# Altium PCB dc_power_module_v1.PcbDoc (part 2 of 4)
Units mm, origin at the board's own origin, x right, y up, seen from the top; angles counter-clockwise.
Board outline 83.82 x 73.41 mm, 2 copper layers (Top Layer, Bottom Layer); 37 components, 20 nets, 131 pads, 21 vias.
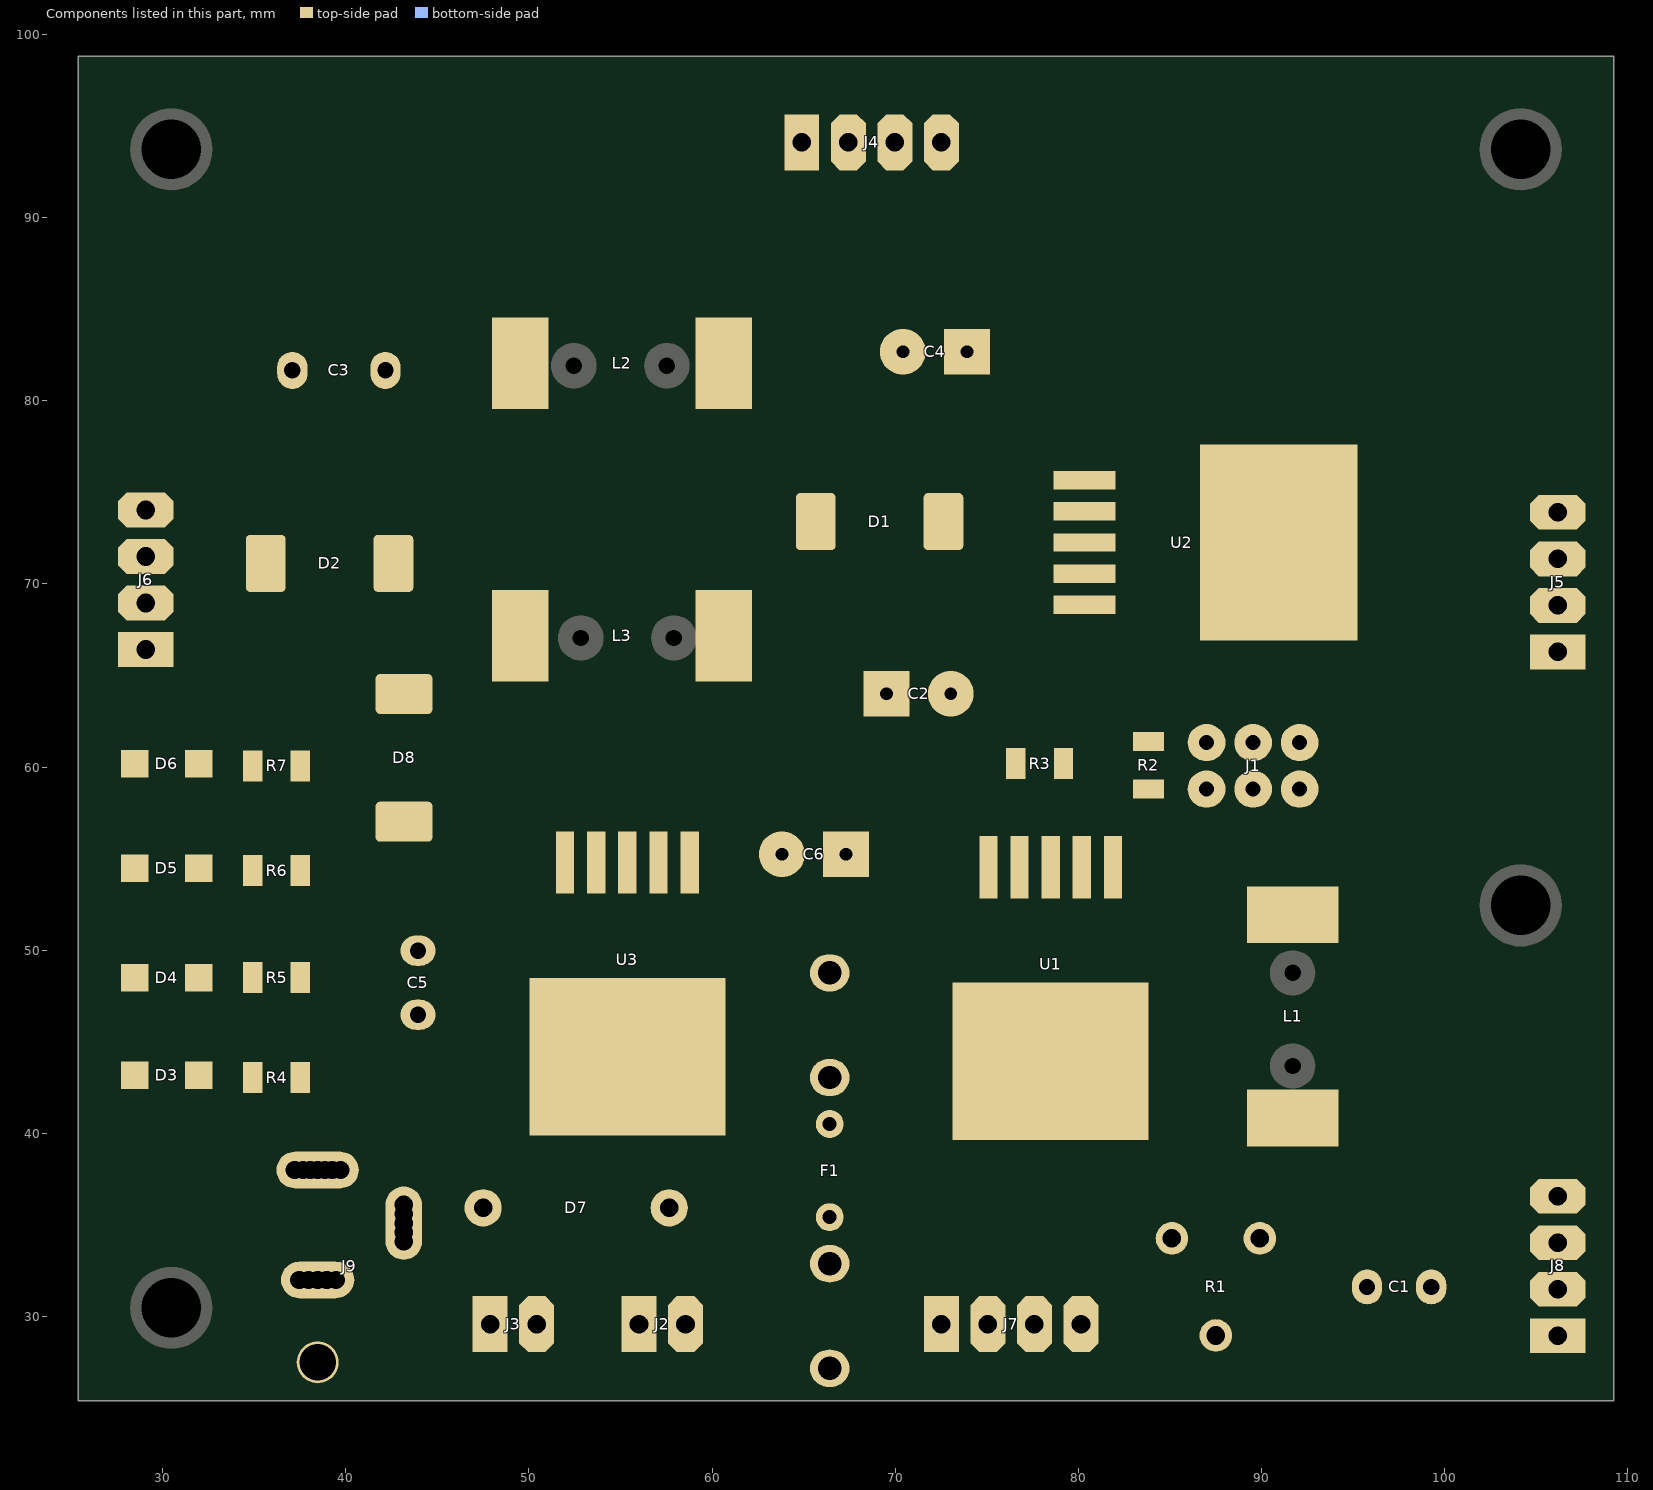
[diagram p2: the components of this part, seen from the top]

## Via types
v1: diameter 1.27, hole 0.711, Top Layer to Bottom Layer, 21 vias

## Nets (pads, with @x,y where several pads share a name; then routed paths per layer and width w, separated by ;. In a path a pad name is that pad's centre, name@x,y a point inside that pad or via, vN(x,y) a via of type N, cw(c..) or ccw(c..) an arc to the next point about the centre after c; other vN are vias at no path point) (continued)
copper on no net: (continued)
  Top Layer w0.008: 38.231,92.881 38.346,92.881 ; 38.231,92.889 38.262,92.889 ; 38.239,92.935 38.254,92.935 ; 38.239,92.942 38.262,92.942 ; 38.239,92.95 38.262,92.95 ; 38.239,92.958 38.27,92.958 ; 38.239,92.965 38.27,92.965 ; 38.239,92.973 38.277,92.973 ; 38.239,92.981 38.277,92.981 ; 38.239,92.988 38.285,92.988 ; 38.239,92.996 38.292,92.996 ; 38.239,93.003 38.292,93.003 ; 38.247,92.874 38.422,92.874 ; 38.247,93.011 38.3,93.011 ; 38.247,93.019 38.3,93.019 ; 38.247,93.026 38.308,93.026 ; 38.247,93.034 38.315,93.034 ; 38.247,93.041 38.315,93.041 ; 38.247,93.049 38.323,93.049 ; 38.247,93.057 38.331,93.057 ; 38.247,93.064 38.331,93.064 ; 38.247,93.072 38.338,93.072 ; 38.247,93.08 38.346,93.08 ; 38.247,93.087 38.353,93.087 ; 38.254,93.095 38.353,93.095 ; 38.254,93.102 38.361,93.102 ; 38.254,93.11 38.369,93.11 ; 38.254,93.118 38.369,93.118 ; 38.254,93.125 38.376,93.125 ; 38.254,93.133 38.384,93.133 ; 38.254,93.141 38.391,93.141 ; 38.262,92.866 38.498,92.866 ; 38.262,93.148 38.399,93.148 ; 38.262,93.156 38.407,93.156 ; 38.262,93.163 38.407,93.163 ; 38.262,93.171 38.414,93.171 ; 38.262,93.179 38.422,93.179 ; 38.262,93.186 38.43,93.186 ; 38.27,92.859 38.582,92.859 ; 38.27,93.194 38.437,93.194 ; 38.27,93.201 38.445,93.201 ; 38.27,93.209 38.452,93.209 ; 38.27,93.217 38.468,93.217 ; 38.27,93.224 38.475,93.224 ; 38.27,93.232 38.483,93.232 ; 38.277,93.24 38.498,93.24 ; 38.277,93.247 38.506,93.247 ; 38.277,93.255 38.521,93.255 ; 38.277,93.262 38.536,93.262 ; 38.277,93.27 38.551,93.27 ; 38.285,92.851 38.666,92.851 ; 38.285,93.278 38.582,93.278 ; 38.285,93.285 39.275,93.285 ; 38.285,93.293 39.275,93.293 ; 38.285,93.301 39.275,93.301 ; 38.292,93.308 39.268,93.308 ; 38.292,93.316 39.268,93.316 ; 38.292,93.323 39.268,93.323 ; 38.292,93.331 39.26,93.331 ; 38.3,92.843 38.757,92.843 ; 38.3,93.339 39.26,93.339 ; 38.3,93.346 39.26,93.346 ; 38.3,93.354 39.253,93.354 ; 38.3,93.362 39.253,93.362 ; 38.308,93.369 39.245,93.369 ; 38.308,93.377 39.245,93.377 ; 38.308,93.384 39.245,93.384 ; 38.308,93.392 39.237,93.392 ; 38.315,93.4 39.237,93.4 ; 38.315,93.407 39.23,93.407 ; 38.315,93.415 39.23,93.415 ; 38.323,92.836 38.849,92.836 ; 38.323,93.422 39.23,93.422 ; 38.323,93.43 39.222,93.43 ; 38.323,93.438 39.222,93.438 ; 38.323,93.445 39.214,93.445 ; 38.331,93.453 39.214,93.453 ; 38.331,93.461 39.214,93.461 ; 38.331,93.468 39.207,93.468 ; 38.338,92.828 38.948,92.828 ; 38.338,93.476 39.207,93.476 ; 38.338,93.483 39.199,93.483 ; 38.338,93.491 39.199,93.491 ; 38.346,93.499 39.199,93.499 ; 38.346,93.506 39.192,93.506 ; 38.346,93.514 39.192,93.514 ; 38.353,92.82 39.405,92.82 ; 38.353,93.522 39.184,93.522 ; 38.353,93.529 39.184,93.529 ; 38.353,93.537 39.176,93.537 ; 38.361,93.544 39.176,93.544 ; 38.361,93.552 39.169,93.552 ; 38.369,92.813 39.405,92.813 ; 38.369,93.56 39.169,93.56 ; 38.369,93.567 39.161,93.567 ; 38.369,93.575 39.161,93.575 ; 38.376,93.582 39.153,93.582 ; 38.376,93.59 39.153,93.59 ; 38.384,93.598 39.146,93.598 ; 38.384,93.605 39.146,93.605 ; 38.384,93.613 39.138,93.613 ; 38.391,92.805 39.443,92.805 ; 38.391,93.621 39.138,93.621 ; 38.391,93.628 39.131,93.628 ; 38.399,93.636 39.131,93.636 ; 38.399,93.643 39.123,93.643 ; 38.407,92.798 41.798,92.798 ; 38.407,93.651 39.115,93.651 ; 38.407,93.659 39.115,93.659 ; 38.407,93.666 39.108,93.666 ; 38.414,93.674 39.108,93.674 ; 38.414,93.682 39.1,93.682 ; 38.422,93.689 39.1,93.689 ; 38.422,93.697 39.093,93.697 ; 38.43,92.79 41.76,92.79 ; 38.43,93.704 39.085,93.704 ; 38.43,93.712 39.085,93.712 ; 38.437,93.72 39.077,93.72 ; 38.445,92.782 41.721,92.782 ; 38.445,93.727 39.07,93.727 ; 38.445,93.735 39.07,93.735 ; 38.452,93.743 39.062,93.743 ; 38.452,93.75 39.054,93.75 ; 38.46,93.758 39.047,93.758 ; 38.46,93.765 39.047,93.765 ; 38.468,92.775 41.691,92.775 ; 38.468,93.773 39.039,93.773 ; 38.475,93.781 39.032,93.781 ; 38.475,93.788 39.024,93.788 ; 38.483,93.796 39.024,93.796 ; 38.491,92.767 41.653,92.767 ; 38.491,93.803 39.016,93.803 ; 38.491,93.811 39.009,93.811 ; 38.498,93.819 39.001,93.819 ; 38.506,92.76 41.615,92.76 ; 38.506,93.826 38.993,93.826 ; 38.513,93.834 38.986,93.834 ; 38.513,93.842 38.978,93.842 ; 38.521,93.849 38.971,93.849 ; 38.529,92.752 41.577,92.752 ; 38.529,93.857 38.963,93.857 ; 38.536,93.864 38.955,93.864 ; 38.544,93.872 38.948,93.872 ; 38.551,92.744 41.539,92.744 ; 38.551,93.88 38.94,93.88 ; 38.559,93.887 38.932,93.887 ; 38.567,93.895 38.917,93.895 ; 38.574,92.737 41.493,92.737 ; 38.574,93.903 38.91,93.903 ; 38.582,93.91 38.902,93.91 ; 38.597,93.918 38.887,93.918 ; 38.605,92.729 41.455,92.729 ; 38.605,93.925 38.879,93.925 ; 38.62,93.933 38.864,93.933 ; 38.635,92.721 41.401,92.721 ; 38.635,93.278 39.283,93.278 ; 38.635,93.941 38.849,93.941 ; 38.651,93.948 38.826,93.948 ; 38.666,92.714 41.348,92.714 ; 38.666,93.27 39.283,93.27 ; 38.666,93.956 38.811,93.956 ; 38.681,93.262 39.283,93.262 ; 38.696,93.255 39.291,93.255 ; 38.696,93.963 38.772,93.963 ; 38.704,92.706 41.295,92.706 ; 38.712,93.247 39.291,93.247 ; 38.727,93.24 39.291,93.24 ; 38.734,93.232 39.298,93.232 ; 38.742,92.699 41.234,92.699 ; 38.742,93.224 39.298,93.224 ; 38.75,93.217 39.298,93.217 ; 38.765,93.209 39.306,93.209 ; 38.772,93.201 39.306,93.201 ; 38.78,93.194 39.306,93.194 ; 38.788,92.691 41.165,92.691 ; 38.788,93.179 39.313,93.179 ; 38.788,93.186 39.313,93.186 ; 38.795,93.171 39.313,93.171 ; 38.803,93.163 39.313,93.163 ; 38.811,93.156 39.321,93.156 ; 38.818,93.148 39.321,93.148 ; 38.826,93.141 39.321,93.141 ; 38.833,92.683 41.097,92.683 ; 38.833,93.125 39.329,93.125 ; 38.833,93.133 39.329,93.133 ; 38.841,93.118 39.329,93.118 ; 38.849,93.11 39.336,93.11 ; 38.856,93.095 39.336,93.095 ; 38.856,93.102 39.336,93.102 ; 38.864,93.087 39.336,93.087 ; 38.872,93.072 39.344,93.072 ; 38.872,93.08 39.344,93.08 ; 38.879,93.064 39.344,93.064 ; 38.887,93.057 39.344,93.057 ; 38.894,92.676 41.028,92.676 ; 38.894,93.041 39.352,93.041 ; 38.894,93.049 39.352,93.049 ; 38.902,93.026 39.359,93.026 ; 38.902,93.034 39.352,93.034 ; 38.91,93.019 39.359,93.019 ; 38.917,93.003 39.359,93.003 ; 38.917,93.011 39.359,93.011 ; 38.925,92.996 39.367,92.996 ; 38.932,92.981 39.367,92.981 ; 38.932,92.988 39.367,92.988 ; 38.94,92.965 39.374,92.965 ; 38.94,92.973 39.367,92.973 ; 38.948,92.958 39.374,92.958 ; 38.955,92.668 40.944,92.668 ; 38.955,92.942 39.374,92.942 ; 38.955,92.95 39.374,92.95 ; 38.963,92.927 39.382,92.927 ; 38.963,92.935 39.382,92.935 ; 38.971,92.912 39.382,92.912 ; 38.971,92.92 39.382,92.92 ; 38.978,92.904 39.39,92.904 ; 38.986,92.889 39.39,92.889 ; 38.986,92.897 39.39,92.897 ; 38.993,92.874 39.397,92.874 ; 38.993,92.881 39.39,92.881 ; 39.001,92.859 39.397,92.859 ; 39.001,92.866 39.397,92.866 ; 39.009,92.843 39.405,92.843 ; 39.009,92.851 39.397,92.851 ; 39.016,92.828 39.405,92.828 ; 39.016,92.836 39.405,92.836 ; 39.024,92.66 40.86,92.66 ; 39.1,92.645 40.662,92.645 ; 39.1,92.653 40.769,92.653 ; 39.108,92.622 39.451,92.622 ; 39.108,92.63 39.443,92.63 ; 39.108,92.638 40.548,92.638 ; 39.115,92.6 39.451,92.6 ; 39.115,92.607 39.451,92.607 ; 39.115,92.615 39.451,92.615 ; 39.123,92.584 39.458,92.584 ; 39.123,92.592 39.451,92.592 ; 39.131,92.561 39.458,92.561 ; 39.131,92.569 39.458,92.569 ; 39.131,92.577 39.458,92.577 ; 39.138,92.539 39.466,92.539 ; 39.138,92.546 39.466,92.546 ; 39.138,92.554 39.458,92.554 ; 39.146,92.516 39.466,92.516 ; 39.146,92.523 39.466,92.523 ; 39.146,92.531 39.466,92.531 ; 39.153,92.493 39.474,92.493 ; 39.153,92.5 39.474,92.5 ; 39.153,92.508 39.466,92.508 ; 39.161,92.47 39.474,92.47 ; 39.161,92.478 39.474,92.478 ; 39.161,92.485 39.474,92.485 ; 39.169,92.447 39.481,92.447 ; 39.169,92.455 39.481,92.455 ; 39.169,92.462 39.474,92.462 ; 39.176,92.424 39.481,92.424 ; 39.176,92.432 39.481,92.432 ; 39.176,92.439 39.481,92.439 ; 39.184,92.401 39.489,92.401 ; 39.184,92.409 39.489,92.409 ; 39.184,92.417 39.481,92.417 ; 39.192,92.379 39.489,92.379 ; 39.192,92.386 39.489,92.386 ; 39.192,92.394 39.489,92.394 ; 39.199,92.348 39.496,92.348 ; 39.199,92.356 39.496,92.356 ; 39.199,92.363 39.496,92.363 ; 39.199,92.371 39.489,92.371 ; 39.207,92.325 39.496,92.325 ; 39.207,92.333 39.496,92.333 ; 39.207,92.34 39.496,92.34 ; 39.214,92.295 39.504,92.295 ; 39.214,92.302 39.504,92.302 ; 39.214,92.31 39.504,92.31 ; 39.214,92.318 39.504,92.318 ; 39.222,92.272 39.512,92.272 ; 39.222,92.279 39.504,92.279 ; 39.222,92.287 39.504,92.287 ; 39.23,92.241 39.512,92.241 ; 39.23,92.249 39.512,92.249 ; 39.23,92.257 39.512,92.257 ; 39.23,92.264 39.512,92.264 ; 39.237,92.211 39.519,92.211 ; 39.237,92.219 39.519,92.219 ; 39.237,92.226 39.512,92.226 ; 39.237,92.234 39.512,92.234 ; 39.245,92.18 39.519,92.18 ; 39.245,92.188 39.519,92.188 ; 39.245,92.196 39.519,92.196 ; 39.245,92.203 39.519,92.203 ; 39.253,92.15 39.527,92.15 ; 39.253,92.158 39.527,92.158 ; 39.253,92.165 39.527,92.165 ; 39.253,92.173 39.519,92.173 ; 39.26,92.119 39.527,92.119 ; 39.26,92.127 39.527,92.127 ; 39.26,92.135 39.527,92.135 ; 39.26,92.142 39.527,92.142 ; 39.268,92.089 39.534,92.089 ; 39.268,92.097 39.534,92.097 ; 39.268,92.104 39.534,92.104 ; 39.268,92.112 39.534,92.112 ; 39.275,92.058 39.534,92.058 ; 39.275,92.066 39.534,92.066 ; 39.275,92.074 39.534,92.074 ; 39.275,92.081 39.534,92.081 ; 39.283,92.02 39.542,92.02 ; 39.283,92.028 39.542,92.028 ; 39.283,92.036 39.542,92.036 ; 39.283,92.043 39.542,92.043 ; 39.283,92.051 39.542,92.051 ; 39.291,91.99 39.55,91.99 ; 39.291,91.998 39.542,91.998 ; 39.291,92.005 39.542,92.005 ; 39.291,92.013 39.542,92.013 ; 39.298,91.952 39.55,91.952 ; 39.298,91.959 39.55,91.959 ; 39.298,91.967 39.55,91.967 ; 39.298,91.975 39.55,91.975 ; 39.298,91.982 39.55,91.982 ; 39.306,91.921 39.557,91.921 ; 39.306,91.929 39.557,91.929 ; 39.306,91.937 39.55,91.937 ; 39.306,91.944 39.55,91.944 ; 39.313,91.883 39.557,91.883 ; 39.313,91.891 39.557,91.891 ; 39.313,91.898 39.557,91.898 ; 39.313,91.906 39.557,91.906 ; 39.313,91.914 39.557,91.914 ; 39.321,91.845 39.565,91.845 ; 39.321,91.853 39.565,91.853 ; 39.321,91.86 39.565,91.86 ; 39.321,91.868 39.565,91.868 ; 39.321,91.876 39.557,91.876 ; 39.329,91.799 39.565,91.799 ; 39.329,91.807 39.565,91.807 ; 39.329,91.815 39.565,91.815 ; 39.329,91.822 39.565,91.822 ; 39.329,91.83 39.565,91.83 ; 39.329,91.838 39.565,91.838 ; 39.336,91.761 39.573,91.761 ; 39.336,91.769 39.573,91.769 ; 39.336,91.777 39.573,91.777 ; 39.336,91.784 39.573,91.784 ; 39.336,91.792 39.573,91.792 ; 39.344,91.723 39.58,91.723 ; 39.344,91.731 39.573,91.731 ; 39.344,91.738 39.573,91.738 ; 39.344,91.746 39.573,91.746 ; 39.344,91.754 39.573,91.754 ; 39.352,91.677 39.58,91.677 ; 39.352,91.685 39.58,91.685 ; 39.352,91.693 39.58,91.693 ; 39.352,91.7 39.58,91.7 ; 39.352,91.708 39.58,91.708 ; 39.352,91.716 39.58,91.716 ; 39.359,91.632 39.588,91.632 ; 39.359,91.639 39.588,91.639 ; 39.359,91.647 39.588,91.647 ; 39.359,91.655 39.58,91.655 ; 39.359,91.662 39.58,91.662 ; 39.359,91.67 39.58,91.67 ; 39.367,91.586 39.588,91.586 ; 39.367,91.594 39.588,91.594 ; 39.367,91.601 39.588,91.601 ; 39.367,91.609 39.588,91.609 ; 39.367,91.617 39.588,91.617 ; 39.367,91.624 39.588,91.624 ; 39.374,88.965 39.382,88.965 ; 39.374,88.972 39.382,88.972 ; 39.374,88.98 39.39,88.98 ; 39.374,88.988 39.39,88.988 ; 39.374,88.995 39.397,88.995 ; 39.374,89.003 39.397,89.003 ; 39.374,89.01 39.405,89.01 ; 39.374,89.018 39.405,89.018 ; 39.374,89.026 39.413,89.026 ; 39.374,89.033 39.413,89.033 ; 39.374,89.041 39.42,89.041 ; 39.374,89.049 39.42,89.049 ; 39.374,89.056 39.42,89.056 ; 39.374,89.064 39.428,89.064 ; 39.374,89.071 39.428,89.071 ; 39.374,89.079 39.435,89.079 ; 39.374,91.54 39.595,91.54 ; 39.374,91.548 39.595,91.548 ; 39.374,91.556 39.595,91.556 ; 39.374,91.563 39.595,91.563 ; 39.374,91.571 39.588,91.571 ; 39.374,91.578 39.588,91.578 ; 39.382,89.087 39.435,89.087 ; 39.382,89.094 39.435,89.094 ; 39.382,89.102 39.443,89.102 ; 39.382,89.11 39.443,89.11 ; 39.382,89.117 39.443,89.117 ; 39.382,89.125 39.451,89.125 ; 39.382,89.132 39.451,89.132 ; 39.382,91.487 39.595,91.487 ; 39.382,91.495 39.595,91.495 ; 39.382,91.502 39.595,91.502 ; 39.382,91.51 39.595,91.51 ; 39.382,91.517 39.595,91.517 ; 39.382,91.525 39.595,91.525 ; 39.382,91.533 39.595,91.533 ; 39.39,89.14 39.451,89.14 ; 39.39,89.148 39.458,89.148 ; 39.39,89.155 39.458,89.155 ; 39.39,89.163 39.458,89.163 ; 39.39,89.171 39.466,89.171 ; 39.39,89.178 39.466,89.178 ; 39.39,91.434 39.603,91.434 ; 39.39,91.441 39.603,91.441 ; 39.39,91.449 39.603,91.449 ; 39.39,91.457 39.603,91.457 ; 39.39,91.464 39.603,91.464 ; 39.39,91.472 39.603,91.472 ; 39.39,91.479 39.595,91.479 ; 39.397,89.186 39.466,89.186 ; 39.397,89.193 39.474,89.193 ; 39.397,89.201 39.474,89.201 ; 39.397,89.209 39.474,89.209 ; 39.397,89.216 39.474,89.216 ; 39.397,89.224 39.481,89.224 ; 39.397,91.38 39.603,91.38 ; 39.397,91.388 39.603,91.388 ; 39.397,91.396 39.603,91.396 ; 39.397,91.403 39.603,91.403 ; 39.397,91.411 39.603,91.411 ; 39.397,91.418 39.603,91.418 ; 39.397,91.426 39.603,91.426 ; 39.405,89.231 39.481,89.231 ; 39.405,89.239 39.481,89.239 ; 39.405,89.247 39.481,89.247 ; 39.405,89.254 39.489,89.254 ; 39.405,89.262 39.489,89.262 ; 39.405,89.27 39.489,89.27 ; 39.405,91.327 39.611,91.327 ; 39.405,91.335 39.611,91.335 ; 39.405,91.342 39.611,91.342 ; 39.405,91.35 39.611,91.35 ; 39.405,91.357 39.611,91.357 ; 39.405,91.365 39.611,91.365 ; 39.405,91.373 39.611,91.373 ; 39.413,89.277 39.489,89.277 ; 39.413,89.285 39.496,89.285 ; 39.413,89.292 39.496,89.292 ; 39.413,89.3 39.496,89.3 ; 39.413,89.308 39.496,89.308 ; 39.413,89.315 39.504,89.315 ; 39.413,91.266 39.611,91.266 ; 39.413,91.274 39.611,91.274 ; 39.413,91.281 39.611,91.281 ; 39.413,91.289 39.611,91.289 ; 39.413,91.296 39.611,91.296 ; 39.413,91.304 39.611,91.304 ; 39.413,91.312 39.611,91.312 ; 39.413,91.319 39.611,91.319 ; 39.42,89.323 39.504,89.323 ; 39.42,89.331 39.504,89.331 ; 39.42,89.338 39.504,89.338 ; 39.42,89.346 39.512,89.346 ; 39.42,89.353 39.512,89.353 ; 39.42,89.361 39.512,89.361 ; 39.42,91.205 39.618,91.205 ; 39.42,91.213 39.618,91.213 ; 39.42,91.22 39.618,91.22 ; 39.42,91.228 39.618,91.228 ; 39.42,91.236 39.618,91.236 ; 39.42,91.243 39.618,91.243 ; 39.42,91.251 39.618,91.251 ; 39.42,91.258 39.618,91.258 ; 39.428,89.369 39.512,89.369 ; 39.428,89.376 39.512,89.376 ; 39.428,89.384 39.519,89.384 ; 39.428,89.391 39.519,89.391 ; 39.428,89.399 39.519,89.399 ; 39.428,89.407 39.519,89.407 ; 39.428,91.136 39.618,91.136 ; 39.428,91.144 39.618,91.144 ; 39.428,91.152 39.618,91.152 ; 39.428,91.159 39.618,91.159 ; 39.428,91.167 39.618,91.167 ; 39.428,91.175 39.618,91.175 ; 39.428,91.182 39.618,91.182 ; 39.428,91.19 39.618,91.19 ; 39.428,91.197 39.618,91.197 ; 39.435,89.414 39.519,89.414 ; 39.435,89.422 39.527,89.422 ; 39.435,89.43 39.527,89.43 ; 39.435,89.437 39.527,89.437 ; 39.435,89.445 39.527,89.445 ; 39.435,89.452 39.527,89.452 ; 39.435,91.068 39.626,91.068 ; 39.435,91.076 39.626,91.076 ; 39.435,91.083 39.626,91.083 ; 39.435,91.091 39.626,91.091 ; 39.435,91.098 39.626,91.098 ; 39.435,91.106 39.626,91.106 ; 39.435,91.114 39.626,91.114 ; 39.435,91.121 39.626,91.121 ; 39.435,91.129 39.626,91.129 ; 39.443,89.46 39.534,89.46 ; 39.443,89.468 39.534,89.468 ; 39.443,89.475 39.534,89.475 ; 39.443,89.483 39.534,89.483 ; 39.443,89.491 39.534,89.491 ; 39.443,89.498 39.534,89.498 ; 39.443,89.506 39.542,89.506 ; 39.443,90.992 39.626,90.992 ; 39.443,90.999 39.626,90.999 ; 39.443,91.007 39.626,91.007 ; 39.443,91.015 39.626,91.015 ; 39.443,91.022 39.626,91.022 ; 39.443,91.03 39.626,91.03 ; 39.443,91.037 39.626,91.037 ; 39.443,91.045 39.626,91.045 ; 39.443,91.053 39.626,91.053 ; 39.443,91.06 39.626,91.06 ; 39.451,89.513 39.542,89.513 ; 39.451,89.521 39.542,89.521 ; 39.451,89.529 39.542,89.529 ; 39.451,89.536 39.542,89.536 ; 39.451,89.544 39.542,89.544 ; 39.451,89.552 39.55,89.552 ; 39.451,89.559 39.55,89.559 ; 39.451,89.567 39.55,89.567 ; 39.451,90.908 39.634,90.908 ; 39.451,90.915 39.634,90.915 ; 39.451,90.923 39.634,90.923 ; 39.451,90.931 39.634,90.931 ; 39.451,90.938 39.634,90.938 ; 39.451,90.946 39.634,90.946 ; 39.451,90.954 39.634,90.954 ; 39.451,90.961 39.626,90.961 ; 39.451,90.969 39.626,90.969 ; 39.451,90.976 39.626,90.976 ; 39.451,90.984 39.626,90.984 ; 39.458,89.574 39.55,89.574 ; 39.458,89.582 39.55,89.582 ; 39.458,89.59 39.55,89.59 ; 39.458,89.597 39.557,89.597 ; 39.458,89.605 39.557,89.605 ; 39.458,89.612 39.557,89.612 ; 39.458,89.62 39.557,89.62 ; 39.458,89.628 39.557,89.628 ; 39.458,89.635 39.557,89.635 ; 39.458,89.643 39.557,89.643 ; 39.458,89.651 39.565,89.651 ; 39.458,90.816 39.634,90.816 ; 39.458,90.824 39.634,90.824 ; 39.458,90.832 39.634,90.832 ; 39.458,90.839 39.634,90.839 ; 39.458,90.847 39.634,90.847 ; 39.458,90.855 39.634,90.855 ; 39.458,90.862 39.634,90.862 ; 39.458,90.87 39.634,90.87 ; 39.458,90.877 39.634,90.877 ; 39.458,90.885 39.634,90.885 ; 39.458,90.893 39.634,90.893 ; 39.458,90.9 39.634,90.9 ; 39.466,89.658 39.565,89.658 ; 39.466,89.666 39.565,89.666 ; 39.466,89.673 39.565,89.673 ; 39.466,89.681 39.565,89.681 ; 39.466,89.689 39.565,89.689 ; 39.466,89.696 39.565,89.696 ; 39.466,89.704 39.573,89.704 ; 39.466,89.712 39.573,89.712 ; 39.466,89.719 39.573,89.719 ; 39.466,89.727 39.573,89.727 ; 39.466,89.734 39.573,89.734 ; 39.466,89.742 39.573,89.742 ; 39.466,89.75 39.573,89.75 ; 39.466,89.757 39.573,89.757 ; 39.466,89.765 39.58,89.765 ; 39.466,89.772 39.58,89.772 ; 39.466,90.71 39.634,90.71 ; 39.466,90.717 39.634,90.717 ; 39.466,90.725 39.634,90.725 ; 39.466,90.733 39.634,90.733 ; 39.466,90.74 39.634,90.74 ; 39.466,90.748 39.634,90.748 ; 39.466,90.755 39.634,90.755 ; 39.466,90.763 39.634,90.763 ; 39.466,90.771 39.634,90.771 ; 39.466,90.778 39.634,90.778 ; 39.466,90.786 39.634,90.786 ; 39.466,90.794 39.634,90.794 ; 39.466,90.801 39.634,90.801 ; 39.466,90.809 39.634,90.809 ; 39.474,89.78 39.58,89.78 ; 39.474,89.788 39.58,89.788 ; 39.474,89.795 39.58,89.795 ; 39.474,89.803 39.58,89.803 ; 39.474,89.811 39.58,89.811 ; 39.474,89.818 39.58,89.818 ; 39.474,89.826 39.588,89.826 ; 39.474,89.833 39.588,89.833 ; 39.474,89.841 39.588,89.841 ; 39.474,89.849 39.588,89.849 ; 39.474,89.856 39.588,89.856 ; 39.474,89.864 39.588,89.864 ; 39.474,89.872 39.588,89.872 ; 39.474,89.879 39.588,89.879 ; 39.474,89.887 39.588,89.887 ; 39.474,89.894 39.595,89.894 ; 39.474,89.902 39.595,89.902 ; 39.474,89.91 39.595,89.91 ; 39.474,89.917 39.595,89.917 ; 39.474,89.925 39.595,89.925 ; 39.474,90.573 39.634,90.573 ; 39.474,90.58 39.634,90.58 ; 39.474,90.588 39.634,90.588 ; 39.474,90.595 39.634,90.595 ; 39.474,90.603 39.634,90.603 ; 39.474,90.611 39.634,90.611 ; 39.474,90.618 39.634,90.618 ; 39.474,90.626 39.634,90.626 ; 39.474,90.634 39.634,90.634 ; 39.474,90.641 39.634,90.641 ; 39.474,90.649 39.634,90.649 ; 39.474,90.656 39.634,90.656 ; 39.474,90.664 39.634,90.664 ; 39.474,90.672 39.634,90.672 ; 39.474,90.679 39.634,90.679 ; 39.474,90.687 39.634,90.687 ; 39.474,90.695 39.634,90.695 ; 39.474,90.702 39.634,90.702 ; 39.481,89.933 39.595,89.933 ; 39.481,89.94 39.595,89.94 ; 39.481,89.948 39.595,89.948 ; 39.481,89.955 39.595,89.955 ; 39.481,89.963 39.595,89.963 ; 39.481,89.971 39.603,89.971 ; 39.481,89.978 39.603,89.978 ; 39.481,89.986 39.603,89.986 ; 39.481,89.993 39.603,89.993 ; 39.481,90.001 39.603,90.001 ; 39.481,90.009 39.603,90.009 ; 39.481,90.016 39.603,90.016 ; 39.481,90.024 39.603,90.024 ; 39.481,90.032 39.603,90.032 ; 39.481,90.039 39.603,90.039 ; 39.481,90.047 39.603,90.047 ; 39.481,90.054 39.603,90.054 ; 39.481,90.062 39.611,90.062 ; 39.481,90.07 39.611,90.07 ; 39.481,90.077 39.611,90.077 ; 39.481,90.085 39.611,90.085 ; 39.481,90.093 39.611,90.093 ; 39.481,90.1 39.611,90.1 ; 39.481,90.108 39.611,90.108 ; 39.481,90.115 39.611,90.115 ; 39.481,90.123 39.611,90.123 ; 39.481,90.131 39.611,90.131 ; 39.481,90.138 39.611,90.138 ; 39.481,90.146 39.611,90.146 ; 39.481,90.153 39.618,90.153 ; 39.481,90.161 39.618,90.161 ; 39.481,90.169 39.618,90.169 ; 39.481,90.176 39.618,90.176 ; 39.481,90.184 39.618,90.184 ; 39.481,90.192 39.618,90.192 ; 39.481,90.199 39.618,90.199 ; 39.481,90.207 39.618,90.207 ; 39.481,90.214 39.618,90.214 ; 39.481,90.222 39.618,90.222 ; 39.481,90.23 39.618,90.23 ; 39.481,90.237 39.618,90.237 ; 39.481,90.245 39.618,90.245 ; 39.481,90.253 39.618,90.253 ; 39.481,90.26 39.618,90.26 ; 39.481,90.268 39.626,90.268 ; 39.481,90.275 39.626,90.275 ; 39.481,90.283 39.626,90.283 ; 39.481,90.291 39.626,90.291 ; 39.481,90.298 39.626,90.298 ; 39.481,90.306 39.626,90.306 ; 39.481,90.314 39.626,90.314 ; 39.481,90.321 39.626,90.321 ; 39.481,90.329 39.626,90.329 ; 39.481,90.336 39.626,90.336 ; 39.481,90.344 39.626,90.344 ; 39.481,90.352 39.626,90.352 ; 39.481,90.359 39.626,90.359 ; 39.481,90.367 39.626,90.367 ; 39.481,90.374 39.626,90.374 ; 39.481,90.382 39.626,90.382 ; 39.481,90.39 39.626,90.39 ; 39.481,90.397 39.626,90.397 ; 39.481,90.405 39.626,90.405 ; 39.481,90.413 39.626,90.413 ; 39.481,90.42 39.634,90.42 ; 39.481,90.428 39.634,90.428 ; 39.481,90.435 39.634,90.435 ; 39.481,90.443 39.634,90.443 ; 39.481,90.451 39.634,90.451 ; 39.481,90.458 39.634,90.458 ; 39.481,90.466 39.634,90.466 ; 39.481,90.474 39.634,90.474 ; 39.481,90.481 39.634,90.481 ; 39.481,90.489 39.634,90.489 ; 39.481,90.496 39.634,90.496 ; 39.481,90.504 39.634,90.504 ; 39.481,90.512 39.634,90.512 ; 39.481,90.519 39.634,90.519 ; 39.481,90.527 39.634,90.527 ; 39.481,90.534 39.634,90.534 ; 39.481,90.542 39.634,90.542 ; 39.481,90.55 39.634,90.55 ; 39.481,90.557 39.634,90.557 ; 39.481,90.565 39.634,90.565 ; 39.496,92.63 40.411,92.63 ; 39.573,92.394 39.618,92.394 ; 39.58,92.386 39.702,92.386 ; 39.595,92.379 39.786,92.379 ; 39.611,92.371 39.87,92.371 ; 39.626,92.363 39.969,92.363 ; 39.641,92.356 40.068,92.356 ; 39.664,92.348 40.197,92.348 ; 39.672,92.805 41.828,92.805 ; 39.687,92.34 40.388,92.34 ; 39.71,92.333 43.261,92.333 ; 39.733,92.325 43.223,92.325 ; 39.763,92.318 43.177,92.318 ; 39.778,92.622 40.22,92.622 ; 39.786,92.31 43.139,92.31 ; 39.816,92.302 43.093,92.302 ; 39.839,92.295 43.047,92.295 ; 39.87,92.287 43.009,92.287 ; 39.885,92.813 41.866,92.813 ; 39.9,88.774 40.159,88.774 ; 39.9,88.782 40.159,88.782 ; 39.908,89.064 40.129,89.064 ; 39.908,89.071 40.129,89.071 ; 39.908,89.079 40.129,89.079 ; 39.908,89.087 40.129,89.087 ; 39.908,89.094 40.129,89.094 ; 39.908,89.331 40.129,89.331 ; 39.908,89.338 40.129,89.338 ; 39.908,89.346 40.129,89.346 ; 39.908,89.353 40.129,89.353 ; 39.908,92.279 42.963,92.279 ; 39.915,89.041 40.121,89.041 ; 39.915,89.049 40.121,89.049 ; 39.915,89.056 40.129,89.056 ; 39.915,89.102 40.129,89.102 ; 39.915,89.11 40.121,89.11 ; 39.915,89.117 40.121,89.117 ; 39.915,89.125 40.121,89.125 ; 39.915,89.3 40.121,89.3 ; 39.915,89.308 40.121,89.308 ; 39.915,89.315 40.121,89.315 ; 39.915,89.323 40.129,89.323 ; 39.915,89.361 40.129,89.361 ; 39.915,89.369 40.129,89.369 ; 39.915,89.376 40.121,89.376 ; 39.915,89.384 40.121,89.384 ; 39.923,88.767 40.159,88.767 ; 39.923,89.026 40.114,89.026 ; 39.923,89.033 40.121,89.033 ; 39.923,89.132 40.114,89.132 ; 39.923,89.14 40.114,89.14 ; 39.923,89.285 40.114,89.285 ; 39.923,89.292 40.114,89.292 ; 39.923,89.391 40.121,89.391 ; 39.923,89.399 40.114,89.399 ; 39.931,89.018 40.106,89.018 ; 39.931,89.148 40.106,89.148 ; 39.931,89.277 40.106,89.277 ; 39.931,89.407 40.106,89.407 ; 39.938,88.469 40.007,88.469 ; 39.938,88.477 39.999,88.477 ; 39.938,88.751 39.999,88.751 ; 39.938,88.759 40.159,88.759 ; 39.938,89.003 40.098,89.003 ; 39.938,89.01 40.106,89.01 ; 39.938,89.155 40.098,89.155 ; 39.938,89.27 40.098,89.27 ; 39.938,89.414 40.106,89.414 ; 39.938,89.422 40.098,89.422 ; 39.938,92.272 42.918,92.272 ; 39.946,88.485 39.999,88.485 ; 39.946,88.492 39.999,88.492 ; 39.946,88.5 39.999,88.5 ; 39.946,88.508 39.999,88.508 ; 39.946,88.515 39.999,88.515 ; 39.946,88.523 39.999,88.523 ; 39.946,88.53 39.999,88.53 ; 39.946,88.538 39.999,88.538 ; 39.946,88.546 39.999,88.546 ; 39.946,88.553 39.999,88.553 ; 39.946,88.561 39.999,88.561 ; 39.946,88.569 39.999,88.569 ; 39.946,88.576 39.999,88.576 ; 39.946,88.584 39.999,88.584 ; 39.946,88.591 39.999,88.591 ; 39.946,88.599 39.999,88.599 ; 39.946,88.607 39.999,88.607 ; 39.946,88.614 40.136,88.614 ; 39.946,88.622 40.136,88.622 ; 39.946,88.629 40.136,88.629 ; 39.946,88.637 39.999,88.637 ; 39.946,88.645 39.999,88.645 ; 39.946,88.652 39.999,88.652 ; 39.946,88.66 39.999,88.66 ; 39.946,88.668 39.999,88.668 ; 39.946,88.675 39.999,88.675 ; 39.946,88.683 39.999,88.683 ; 39.946,88.69 39.999,88.69 ; 39.946,88.698 39.999,88.698 ; 39.946,88.706 39.999,88.706 ; 39.946,88.713 39.999,88.713 ; 39.946,88.721 39.999,88.721 ; 39.946,88.729 39.999,88.729 ; 39.946,88.736 39.999,88.736 ; 39.946,88.744 39.999,88.744 ; 39.946,89.163 40.091,89.163 ; 39.946,89.262 40.091,89.262 ; 39.954,88.995 40.091,88.995 ; 39.954,89.171 40.083,89.171 ; 39.954,89.254 40.083,89.254 ; 39.954,89.43 40.091,89.43 ; 39.961,88.988 40.075,88.988 ; 39.961,89.437 40.075,89.437 ; 39.961,89.597 40.182,89.597 ; 39.961,89.605 40.182,89.605 ; 39.961,89.612 40.182,89.612 ; 39.961,89.62 40.182,89.62 ; 39.969,89.178 40.068,89.178 ; 39.969,89.247 40.075,89.247 ; 39.969,89.567 40.175,89.567 ; 39.969,89.574 40.175,89.574 ; 39.969,89.582 40.182,89.582 ; 39.969,89.59 40.182,89.59 ; 39.969,89.628 40.182,89.628 ; 39.969,89.635 40.175,89.635 ; 39.969,89.643 40.175,89.643 ; 39.969,92.264 42.872,92.264 ; 39.976,88.98 40.06,88.98 ; 39.976,89.445 40.06,89.445 ; 39.976,89.552 40.167,89.552 ; 39.976,89.559 40.175,89.559 ; 39.976,89.651 40.175,89.651 ; 39.976,89.658 40.167,89.658 ; 39.984,89.186 40.053,89.186 ; 39.984,89.239 40.053,89.239 ; 39.984,89.536 40.159,89.536 ; 39.984,89.544 40.167,89.544 ; 39.984,89.666 40.167,89.666 ; 39.984,89.673 40.159,89.673 ; 39.992,89.529 40.152,89.529 ; 39.992,89.681 40.152,89.681 ; 39.999,89.521 40.144,89.521 ; 39.999,89.689 40.144,89.689 ; 40.007,92.257 42.819,92.257 ; 40.007,92.82 41.897,92.82 ; 40.015,89.513 40.136,89.513 ; 40.015,89.696 40.136,89.696 ; 40.022,89.506 40.121,89.506 ; 40.022,89.704 40.121,89.704 ; 40.037,92.249 42.773,92.249 ; 40.045,89.712 40.098,89.712 ; 40.053,89.498 40.098,89.498 ; 40.068,89.841 40.281,89.841 ; 40.068,89.849 40.281,89.849 ; 40.068,89.856 40.281,89.856 ; 40.068,89.864 40.281,89.864 ; 40.068,89.872 40.281,89.872 ; 40.068,89.879 40.281,89.879 ; 40.068,89.887 40.281,89.887 ; 40.068,89.894 40.281,89.894 ; 40.075,88.607 40.136,88.607 ; 40.075,89.818 40.274,89.818 ; 40.075,89.826 40.281,89.826 ; 40.075,89.833 40.281,89.833 ; 40.075,89.902 40.281,89.902 ; 40.075,89.91 40.281,89.91 ; 40.075,89.917 40.274,89.917 ; 40.075,92.241 42.72,92.241 ; 40.083,89.811 40.274,89.811 ; 40.083,89.925 40.274,89.925 ; 40.091,89.795 40.258,89.795 ; 40.091,89.803 40.266,89.803 ; 40.091,89.933 40.266,89.933 ; 40.098,88.599 40.136,88.599 ; 40.098,88.637 40.136,88.637 ; 40.098,89.788 40.251,89.788 ; 40.098,89.94 40.258,89.94 ; 40.098,92.828 41.935,92.828 ; 40.106,88.591 40.136,88.591 ; 40.106,88.645 40.136,88.645 ; 40.106,89.78 40.243,89.78 ; 40.106,89.948 40.251,89.948 ; 40.114,88.469 40.175,88.469 ; 40.114,88.561 40.136,88.561 ; 40.114,88.569 40.136,88.569 ; 40.114,88.576 40.136,88.576 ; 40.114,88.584 40.136,88.584 ; 40.114,88.652 40.136,88.652 ; 40.114,88.66 40.136,88.66 ; 40.114,88.668 40.136,88.668 ; 40.114,88.675 40.136,88.675 ; 40.114,89.955 40.243,89.955 ; 40.114,92.234 42.674,92.234 ; 40.121,89.772 40.236,89.772 ; 40.121,89.963 40.228,89.963 ; 40.129,88.477 40.175,88.477 ; 40.129,88.751 40.159,88.751 ; 40.136,88.736 40.167,88.736 ; 40.136,88.744 40.167,88.744 ; 40.136,89.765 40.213,89.765 ; 40.136,89.971 40.213,89.971 ; 40.144,88.485 40.175,88.485 ; 40.144,88.706 40.167,88.706 ; 40.144,88.713 40.167,88.713 ; 40.144,88.721 40.167,88.721 ; 40.144,88.729 40.167,88.729 ; 40.152,88.492 40.182,88.492 ; 40.152,88.5 40.182,88.5 ; 40.152,92.226 42.613,92.226 ; 40.159,88.508 40.182,88.508 ; 40.167,88.515 40.19,88.515 ; 40.167,88.523 40.19,88.523 ; 40.175,88.53 40.19,88.53 ; 40.175,89.308 40.388,89.308 ; 40.175,89.315 40.388,89.315 ; 40.175,89.323 40.388,89.323 ; 40.175,89.331 40.388,89.331 ; 40.175,89.338 40.388,89.338 ; 40.175,89.346 40.388,89.346 ; 40.175,89.353 40.388,89.353 ; 40.175,89.361 40.388,89.361 ; 40.175,89.369 40.388,89.369 ; 40.175,89.376 40.388,89.376 ; 40.175,90.1 40.388,90.1 ; 40.175,90.108 40.388,90.108 ; 40.175,90.115 40.388,90.115 ; 40.175,90.123 40.388,90.123 ; 40.175,90.131 40.388,90.131 ; 40.175,90.138 40.388,90.138 ; 40.175,90.146 40.388,90.146 ; 40.175,90.153 40.388,90.153 ; 40.175,90.161 40.388,90.161 ; 40.182,89.292 40.38,89.292 ; 40.182,89.3 40.38,89.3 ; 40.182,89.384 40.38,89.384 ; 40.182,89.391 40.38,89.391 ; 40.182,90.077 40.38,90.077 ; 40.182,90.085 40.38,90.085 ; 40.182,90.093 40.388,90.093 ; 40.182,90.169 40.388,90.169 ; 40.182,90.176 40.38,90.176 ; 40.182,90.184 40.38,90.184 ; 40.182,92.836 41.965,92.836 ; 40.19,89.277 40.373,89.277 ; 40.19,89.285 40.373,89.285 ; 40.19,89.399 40.373,89.399 ; 40.19,89.407 40.373,89.407 ; 40.19,90.07 40.373,90.07 ; 40.19,90.192 40.373,90.192 ; 40.19,92.219 42.56,92.219 ; 40.197,89.27 40.365,89.27 ; 40.197,89.414 40.365,89.414 ; 40.197,90.062 40.365,90.062 ; 40.197,90.199 40.365,90.199 ; 40.205,89.262 40.357,89.262 ; 40.205,89.422 40.357,89.422 ; 40.205,90.054 40.365,90.054 ; 40.205,90.207 40.357,90.207 ; 40.213,89.254 40.35,89.254 ; 40.213,89.43 40.35,89.43 ; 40.213,90.047 40.357,90.047 ; 40.213,90.214 40.35,90.214 ; 40.22,90.039 40.342,90.039 ; 40.22,90.222 40.342,90.222 ; 40.228,89.247 40.335,89.247 ; 40.228,89.437 40.342,89.437 ; 40.236,89.445 40.327,89.445 ; 40.236,90.032 40.335,90.032 ; 40.236,90.23 40.327,90.23 ; 40.236,92.211 42.506,92.211 ; 40.243,89.239 40.319,89.239 ; 40.251,90.024 40.312,90.024 ; 40.251,92.843 42.003,92.843 ; 40.258,90.237 40.304,90.237 ; 40.274,92.203 42.445,92.203 ; 40.312,92.851 42.034,92.851 ; 40.319,92.196 42.384,92.196 ; 40.365,92.859 42.064,92.859 ; 40.373,92.188 42.316,92.188 ; 40.411,88.774 40.563,88.774 ; 40.411,88.782 40.563,88.782 ; 40.418,92.866 42.095,92.866 ; 40.434,88.767 40.54,88.767 ; 40.434,89.315 40.647,89.315 ; 40.434,89.323 40.647,89.323 ; 40.434,89.331 40.647,89.331 ; 40.434,89.338 40.647,89.338 ; 40.434,89.346 40.647,89.346 ; 40.434,89.353 40.647,89.353 ; 40.434,89.361 40.647,89.361 ; 40.434,89.369 40.647,89.369 ; 40.434,90.1 40.647,90.1 ; 40.434,90.108 40.647,90.108 ; 40.434,90.115 40.647,90.115 ; 40.434,90.123 40.647,90.123 ; 40.434,90.131 40.647,90.131 ; 40.434,90.138 40.647,90.138 ; 40.434,90.146 40.647,90.146 ; 40.434,90.153 40.647,90.153 ; 40.434,90.161 40.647,90.161 ; 40.434,92.18 42.247,92.18 ; 40.441,89.292 40.639,89.292 ; 40.441,89.3 40.639,89.3 ; 40.441,89.308 40.647,89.308 ; 40.441,89.376 40.647,89.376 ; 40.441,89.384 40.647,89.384 ; 40.441,89.391 40.639,89.391 ; 40.441,90.085 40.639,90.085 ; 40.441,90.093 40.647,90.093 ; 40.441,90.169 40.647,90.169 ; 40.441,90.176 40.639,90.176 ; 40.449,88.469 40.533,88.469 ; 40.449,88.751 40.517,88.751 ; 40.449,88.759 40.525,88.759 ; 40.449,89.285 40.632,89.285 ; 40.449,89.399 40.639,89.399 ; 40.449,89.407 40.632,89.407 ; 40.449,90.07 40.632,90.07 ; 40.449,90.077 40.639,90.077 ; 40.449,90.184 40.639,90.184 ; 40.449,90.192 40.632,90.192 ; 40.456,88.477 40.517,88.477 ; 40.456,88.485 40.51,88.485 ; 40.456,88.492 40.51,88.492 ; 40.456,88.5 40.51,88.5 ; 40.456,88.508 40.51,88.508 ; 40.456,88.515 40.51,88.515 ; 40.456,88.523 40.51,88.523 ; 40.456,88.53 40.51,88.53 ; 40.456,88.538 40.51,88.538 ; 40.456,88.546 40.51,88.546 ; 40.456,88.553 40.51,88.553 ; 40.456,88.561 40.51,88.561 ; 40.456,88.569 40.51,88.569 ; 40.456,88.576 40.51,88.576 ; 40.456,88.584 40.51,88.584 ; 40.456,88.591 40.51,88.591 ; 40.456,88.599 40.51,88.599 ; 40.456,88.607 40.51,88.607 ; 40.456,88.614 40.51,88.614 ; 40.456,88.622 40.51,88.622 ; 40.456,88.629 40.51,88.629 ; 40.456,88.637 40.51,88.637 ; 40.456,88.645 40.51,88.645 ; 40.456,88.652 40.51,88.652 ; 40.456,88.66 40.51,88.66 ; 40.456,88.668 40.51,88.668 ; 40.456,88.675 40.51,88.675 ; 40.456,88.683 40.51,88.683 ; 40.456,88.69 40.51,88.69 ; 40.456,88.698 40.51,88.698 ; 40.456,88.706 40.51,88.706 ; 40.456,88.713 40.51,88.713 ; 40.456,88.721 40.51,88.721 ; 40.456,88.729 40.51,88.729 ; 40.456,88.736 40.51,88.736 ; 40.456,88.744 40.51,88.744 ; 40.456,89.27 40.624,89.27 ; 40.456,89.277 40.632,89.277 ; 40.456,89.414 40.624,89.414 ; 40.456,90.062 40.632,90.062 ; 40.456,90.199 40.624,90.199 ; 40.464,89.262 40.617,89.262 ; 40.464,89.422 40.617,89.422 ; 40.464,90.054 40.624,90.054 ; 40.464,90.207 40.624,90.207 ; 40.472,89.43 40.609,89.43 ; 40.472,90.047 40.617,90.047 ; 40.472,90.214 40.617,90.214 ; 40.472,92.874 42.125,92.874 ; 40.479,89.254 40.609,89.254 ; 40.479,90.039 40.601,90.039 ; 40.479,90.222 40.601,90.222 ; 40.487,89.247 40.594,89.247 ; 40.487,89.437 40.601,89.437 ; 40.495,90.032 40.594,90.032 ; 40.495,90.23 40.586,90.23 ; 40.502,89.445 40.586,89.445 ; 40.51,89.239 40.578,89.239 ; 40.51,92.173 42.171,92.173 ; 40.517,90.024 40.571,90.024 ; 40.517,90.237 40.563,90.237 ; 40.517,92.881 42.156,92.881 ; 40.563,92.889 42.186,92.889 ; 40.586,92.165 42.087,92.165 ; 40.609,88.469 40.685,88.469 ; 40.609,92.897 42.217,92.897 ; 40.639,88.477 40.685,88.477 ; 40.655,88.485 40.685,88.485 ; 40.655,92.904 42.24,92.904 ; 40.662,88.492 40.693,88.492 ; 40.67,88.5 40.693,88.5 ; 40.67,88.508 40.693,88.508 ; 40.67,92.158 41.996,92.158 ; 40.677,88.515 40.7,88.515 ; 40.677,88.523 40.7,88.523 ; 40.685,88.53 40.7,88.53 ; 40.685,88.538 40.7,88.538 ; 40.693,89.239 41.379,89.239 ; 40.693,89.247 41.379,89.247 ; 40.693,89.254 41.371,89.254 ; 40.693,89.262 41.371,89.262 ; 40.693,89.27 41.363,89.27 ; 40.693,89.277 41.363,89.277 ; 40.693,89.285 41.356,89.285 ; 40.693,89.292 41.356,89.292 ; 40.693,89.3 41.348,89.3 ; 40.693,89.308 41.348,89.308 ; 40.693,89.315 41.34,89.315 ; 40.693,89.323 41.34,89.323 ; 40.693,89.331 41.333,89.331 ; 40.693,89.338 41.333,89.338 ; 40.693,89.346 41.325,89.346 ; 40.693,89.353 41.325,89.353 ; 40.693,89.361 41.318,89.361 ; 40.693,89.369 41.318,89.369 ; 40.693,89.376 41.31,89.376 ; 40.693,89.384 41.31,89.384 ; 40.693,89.391 41.302,89.391 ; 40.693,89.399 41.302,89.399 ; 40.693,89.407 41.295,89.407 ; 40.693,89.414 41.295,89.414 ; 40.693,89.422 41.287,89.422 ; 40.693,89.43 41.287,89.43 ; 40.693,89.437 41.279,89.437 ; 40.693,89.445 41.279,89.445 ; 40.693,90.024 40.99,90.024 ; 40.693,90.032 40.99,90.032 ; 40.693,90.039 40.982,90.039 ; 40.693,90.047 40.982,90.047 ; 40.693,90.054 40.975,90.054 ; 40.693,90.062 40.975,90.062 ; 40.693,90.07 40.967,90.07 ; 40.693,90.077 40.967,90.077 ; 40.693,90.085 40.959,90.085 ; 40.693,90.093 40.959,90.093 ; 40.693,90.1 40.952,90.1 ; 40.693,90.108 40.952,90.108 ; 40.693,90.115 40.944,90.115 ; 40.693,90.123 40.944,90.123 ; 40.693,90.131 40.937,90.131 ; 40.693,90.138 40.937,90.138 ; 40.693,90.146 40.929,90.146 ; 40.693,90.153 40.929,90.153 ; 40.693,90.161 40.921,90.161 ; 40.693,90.169 40.921,90.169 ; 40.693,90.176 40.914,90.176 ; 40.693,90.184 40.914,90.184 ; 40.693,90.192 40.914,90.192 ; 40.693,90.199 40.914,90.199 ; 40.693,90.207 40.914,90.207 ; 40.693,90.214 40.914,90.214 ; 40.693,90.222 40.914,90.222 ; 40.693,90.23 40.914,90.23 ; 40.693,90.237 40.914,90.237 ; 40.693,92.912 42.27,92.912 ; 40.723,90.009 40.998,90.009 ; 40.723,90.016 40.998,90.016 ; 40.731,89.993 41.005,89.993 ; 40.731,90.001 41.005,90.001 ; 40.738,89.978 41.013,89.978 ; 40.738,89.986 41.013,89.986 ; 40.738,92.92 42.301,92.92 ; 40.746,89.963 41.02,89.963 ; 40.746,89.971 41.02,89.971 ; 40.754,89.948 41.028,89.948 ; 40.754,89.955 41.028,89.955 ; 40.761,89.933 41.036,89.933 ; 40.761,89.94 41.036,89.94 ; 40.769,89.917 41.043,89.917 ; 40.769,89.925 41.043,89.925 ; 40.777,89.902 41.051,89.902 ; 40.777,89.91 41.051,89.91 ; 40.777,92.15 41.897,92.15 ; 40.777,92.927 42.323,92.927 ; 40.784,89.887 41.058,89.887 ; 40.784,89.894 41.058,89.894 ; 40.792,89.872 41.066,89.872 ; 40.792,89.879 41.066,89.879 ; 40.799,89.856 41.074,89.856 ; 40.799,89.864 41.074,89.864 ; 40.807,89.841 41.081,89.841 ; 40.807,89.849 41.081,89.849 ; 40.815,89.826 41.089,89.826 ; 40.815,89.833 41.089,89.833 ; 40.822,89.811 41.097,89.811 ; 40.822,89.818 41.097,89.818 ; 40.822,92.935 42.354,92.935 ; 40.83,89.795 41.104,89.795 ; 40.83,89.803 41.104,89.803 ; 40.837,89.78 41.112,89.78 ; 40.837,89.788 41.112,89.788 ; 40.845,89.765 41.119,89.765 ; 40.845,89.772 41.119,89.772 ; 40.853,89.75 41.127,89.75 ; 40.853,89.757 41.127,89.757 ; 40.86,89.734 41.135,89.734 ; 40.86,89.742 41.135,89.742 ; 40.86,92.942 42.377,92.942 ; 40.868,89.719 41.142,89.719 ; 40.868,89.727 41.142,89.727 ; 40.876,89.704 41.15,89.704 ; 40.876,89.712 41.15,89.712 ; 40.883,89.689 41.158,89.689 ; 40.883,89.696 41.158,89.696 ; 40.891,89.673 41.165,89.673 ; 40.891,89.681 41.165,89.681 ; 40.898,89.658 41.173,89.658 ; 40.898,89.666 41.173,89.666 ; 40.898,92.142 41.767,92.142 ; 40.906,89.643 41.18,89.643 ; 40.906,89.651 41.18,89.651 ; 40.906,92.95 42.4,92.95 ; 40.914,89.628 41.188,89.628 ; 40.914,89.635 41.188,89.635 ; 40.921,88.774 41.188,88.774 ; 40.921,88.782 41.188,88.782 ; 40.921,89.612 41.196,89.612 ; 40.921,89.62 41.196,89.62 ; 40.929,89.597 41.203,89.597 ; 40.929,89.605 41.203,89.605 ; 40.937,89.582 41.211,89.582 ; 40.937,89.59 41.211,89.59 ; 40.944,88.767 41.188,88.767 ; 40.944,89.567 41.218,89.567 ; 40.944,89.574 41.218,89.574 ; 40.944,92.958 42.43,92.958 ; 40.952,89.552 41.226,89.552 ; 40.952,89.559 41.226,89.559 ; 40.959,88.469 41.028,88.469 ; 40.959,88.759 41.188,88.759 ; 40.959,89.536 41.234,89.536 ; 40.959,89.544 41.234,89.544 ; 40.967,88.477 41.028,88.477 ; 40.967,88.485 41.02,88.485 ; 40.967,88.492 41.02,88.492 ; 40.967,88.5 41.02,88.5 ; 40.967,88.508 41.02,88.508 ; 40.967,88.515 41.02,88.515 ; 40.967,88.523 41.02,88.523 ; 40.967,88.53 41.02,88.53 ; 40.967,88.538 41.02,88.538 ; 40.967,88.546 41.02,88.546 ; 40.967,88.553 41.02,88.553 ; 40.967,88.561 41.02,88.561 ; 40.967,88.569 41.02,88.569 ; 40.967,88.576 41.02,88.576 ; 40.967,88.584 41.02,88.584 ; 40.967,88.591 41.02,88.591 ; 40.967,88.599 41.02,88.599 ; 40.967,88.607 41.02,88.607 ; 40.967,88.614 41.158,88.614 ; 40.967,88.622 41.158,88.622 ; 40.967,88.629 41.158,88.629 ; 40.967,88.637 41.02,88.637 ; 40.967,88.645 41.02,88.645 ; 40.967,88.652 41.02,88.652 ; 40.967,88.66 41.02,88.66 ; 40.967,88.668 41.02,88.668 ; 40.967,88.675 41.02,88.675 ; 40.967,88.683 41.02,88.683 ; 40.967,88.69 41.02,88.69 ; 40.967,88.698 41.02,88.698 ; 40.967,88.706 41.02,88.706 ; 40.967,88.713 41.02,88.713 ; 40.967,88.721 41.02,88.721 ; 40.967,88.729 41.02,88.729 ; 40.967,88.736 41.02,88.736 ; 40.967,88.744 41.02,88.744 ; 40.967,88.751 41.02,88.751 ; 40.967,89.521 41.241,89.521 ; 40.967,89.529 41.241,89.529 ; 40.975,89.506 41.249,89.506 ; 40.975,89.513 41.249,89.513 ; 40.982,89.491 41.257,89.491 ; 40.982,89.498 41.257,89.498 ; 40.99,89.475 41.264,89.475 ; 40.99,89.483 41.264,89.483 ; 40.99,92.965 42.453,92.965 ; 40.998,89.46 41.272,89.46 ; 40.998,89.468 41.264,89.468 ; 41.005,89.452 41.272,89.452 ; 41.028,92.973 42.476,92.973 ; 41.066,92.34 43.299,92.34 ; 41.066,92.981 42.499,92.981 ; 41.081,92.135 41.584,92.135 ; 41.097,88.607 41.158,88.607 ; 41.104,92.988 42.522,92.988 ; 41.112,89.231 41.386,89.231 ; 41.119,88.637 41.158,88.637 ; 41.119,89.216 41.394,89.216 ; 41.119,89.224 41.386,89.224 ; 41.127,88.599 41.158,88.599 ; 41.127,88.645 41.158,88.645 ; 41.127,89.201 41.401,89.201 ; 41.127,89.209 41.394,89.209 ; 41.135,88.469 41.196,88.469 ; 41.135,88.576 41.158,88.576 ; 41.135,88.584 41.158,88.584 ; 41.135,88.591 41.158,88.591 ; 41.135,88.652 41.158,88.652 ; 41.135,88.66 41.158,88.66 ; 41.135,89.186 41.409,89.186 ; 41.135,89.193 41.401,89.193 ; 41.142,88.561 41.158,88.561 ; 41.142,88.569 41.158,88.569 ; 41.142,88.668 41.158,88.668 ; 41.142,88.675 41.158,88.675 ; 41.142,89.171 41.417,89.171 ; 41.142,89.178 41.409,89.178 ; 41.142,92.996 42.544,92.996 ; 41.15,88.751 41.188,88.751 ; 41.15,89.155 41.424,89.155 ; 41.15,89.163 41.417,89.163 ; 41.158,88.477 41.196,88.477 ; 41.158,88.744 41.188,88.744 ; 41.158,89.14 41.432,89.14 ; 41.158,89.148 41.424,89.148 ; 41.165,88.485 41.203,88.485 ; 41.165,88.721 41.188,88.721 ; 41.165,88.729 41.188,88.729 ; 41.165,88.736 41.188,88.736 ; 41.165,89.125 41.432,89.125 ; 41.165,89.132 41.432,89.132 ; 41.173,88.492 41.203,88.492 ; 41.173,88.706 41.188,88.706 ; 41.173,88.713 41.188,88.713 ; 41.173,89.11 41.432,89.11 ; 41.173,89.117 41.432,89.117 ; 41.18,88.5 41.203,88.5 ; 41.18,88.508 41.211,88.508 ; 41.18,89.094 41.432,89.094 ; 41.18,89.102 41.432,89.102 ; 41.18,93.003 42.567,93.003 ; 41.188,88.515 41.211,88.515 ; 41.188,88.523 41.211,88.523 ; 41.188,89.079 41.432,89.079 ; 41.188,89.087 41.432,89.087 ; 41.196,88.53 41.211,88.53 ; 41.196,89.064 41.432,89.064 ; 41.196,89.071 41.432,89.071 ; 41.203,89.049 41.432,89.049 ; 41.203,89.056 41.432,89.056 ; 41.211,89.033 41.432,89.033 ; 41.211,89.041 41.432,89.041 ; 41.218,88.972 41.432,88.972 ; 41.218,88.98 41.432,88.98 ; 41.218,88.988 41.432,88.988 ; 41.218,88.995 41.432,88.995 ; 41.218,89.003 41.432,89.003 ; 41.218,89.01 41.432,89.01 ; 41.218,89.018 41.432,89.018 ; 41.218,89.026 41.432,89.026 ; 41.218,93.011 42.59,93.011 ; 41.234,95.175 41.241,95.175 ; 41.234,95.183 41.249,95.183 ; 41.234,95.19 41.257,95.19 ; 41.234,95.198 41.264,95.198 ; 41.241,95.206 41.264,95.206 ; 41.241,95.213 41.272,95.213 ; 41.241,95.221 41.279,95.221 ; 41.241,95.228 41.279,95.228 ; 41.249,93.019 42.613,93.019 ; 41.249,95.236 41.287,95.236 ; 41.249,95.244 41.295,95.244 ; 41.249,95.251 41.295,95.251 ; 41.257,95.259 41.302,95.259 ; 41.257,95.267 41.31,95.267 ; 41.257,95.274 41.31,95.274 ; 41.264,92.348 43.344,92.348 ; 41.264,95.282 41.318,95.282 ; 41.264,95.289 41.325,95.289 ; 41.264,95.297 41.325,95.297 ; 41.272,95.305 41.333,95.305 ; 41.272,95.312 41.333,95.312 ; 41.272,95.32 41.34,95.32 ; 41.279,95.327 41.348,95.327 ; 41.279,95.335 41.348,95.335 ; 41.287,93.026 42.628,93.026 ; 41.287,95.343 41.356,95.343 ; 41.287,95.35 41.356,95.35 ; 41.295,95.358 41.363,95.358 ; 41.295,95.366 41.371,95.366 ; 41.295,95.373 41.371,95.373 ; 41.302,95.381 41.379,95.381 ; 41.302,95.388 41.379,95.388 ; 41.31,95.396 41.386,95.396 ; 41.31,95.404 41.394,95.404 ; 41.318,93.034 42.651,93.034 ; 41.318,95.411 41.394,95.411 ; 41.318,95.419 41.401,95.419 ; 41.325,95.427 41.409,95.427 ; 41.325,95.434 41.409,95.434 ; 41.333,95.442 41.417,95.442 ; 41.333,95.449 41.417,95.449 ; 41.34,95.457 41.424,95.457 ; 41.34,95.465 41.432,95.465 ; 41.348,95.472 41.432,95.472 ; 41.356,93.041 42.674,93.041 ; 41.356,95.48 41.439,95.48 ; 41.356,95.487 41.447,95.487 ; 41.363,95.495 41.447,95.495 ; 41.363,95.503 41.455,95.503 ; 41.371,95.51 41.462,95.51 ; 41.371,95.518 41.462,95.518 ; 41.379,95.526 41.47,95.526 ; 41.386,93.049 42.689,93.049 ; 41.386,95.533 41.478,95.533 ; 41.386,95.541 41.478,95.541 ; 41.394,95.548 41.485,95.548 ; 41.394,95.556 41.493,95.556 ; 41.401,92.356 43.383,92.356 ; 41.401,95.564 41.493,95.564 ; 41.409,95.571 41.5,95.571 ; 41.409,95.579 41.508,95.579 ; 41.417,93.057 42.712,93.057 ; 41.417,95.587 41.508,95.587 ; 41.417,95.594 41.516,95.594 ; 41.424,95.602 41.523,95.602 ; 41.432,95.609 41.531,95.609 ; 41.432,95.617 41.531,95.617 ; 41.439,88.569 41.508,88.569 ; 41.439,88.576 41.508,88.576 ; 41.439,88.584 41.508,88.584 ; 41.439,88.591 41.5,88.591 ; 41.439,88.599 41.5,88.599 ; 41.439,88.607 41.5,88.607 ; 41.439,88.614 41.5,88.614 ; 41.439,88.622 41.5,88.622 ; 41.439,88.629 41.508,88.629 ; 41.439,88.637 41.508,88.637 ; 41.439,88.645 41.508,88.645 ; 41.439,95.625 41.539,95.625 ; 41.447,88.538 41.516,88.538 ; 41.447,88.546 41.508,88.546 ; 41.447,88.553 41.508,88.553 ; 41.447,88.561 41.508,88.561 ; 41.447,88.652 41.508,88.652 ; 41.447,88.66 41.508,88.66 ; 41.447,88.668 41.508,88.668 ; 41.447,88.675 41.516,88.675 ; 41.447,95.632 41.546,95.632 ; 41.447,95.64 41.554,95.64 ; 41.455,88.523 41.523,88.523 ; 41.455,88.53 41.516,88.53 ; 41.455,88.683 41.516,88.683 ; 41.455,88.69 41.516,88.69 ; 41.455,93.064 42.727,93.064 ; 41.455,95.648 41.554,95.648 ; 41.462,88.508 41.531,88.508 ; 41.462,88.515 41.523,88.515 ; 41.462,88.698 41.523,88.698 ; 41.462,88.706 41.523,88.706 ; 41.462,95.655 41.561,95.655 ; 41.462,95.663 41.569,95.663 ; 41.47,88.5 41.539,88.5 ; 41.47,88.713 41.531,88.713 ; 41.47,88.721 41.531,88.721 ; 41.47,95.67 41.577,95.67 ; 41.478,88.485 41.554,88.485 ; 41.478,88.492 41.546,88.492 ; 41.478,88.729 41.539,88.729 ; 41.478,95.678 41.577,95.678 ; 41.478,95.686 41.584,95.686 ; 41.485,88.477 41.561,88.477 ; 41.485,88.736 41.546,88.736 ; 41.485,93.072 42.75,93.072 ; 41.485,95.693 41.592,95.693 ; 41.493,88.469 41.577,88.469 ; 41.493,88.744 41.554,88.744 ; 41.493,95.701 41.599,95.701 ; 41.493,95.708 41.599,95.708 ; 41.5,88.751 41.561,88.751 ; 41.5,95.716 41.607,95.716 ; 41.508,88.759 41.577,88.759 ; 41.508,95.724 41.615,95.724 ; 41.508,95.731 41.622,95.731 ; 41.516,92.363 43.421,92.363 ; 41.516,93.08 42.765,93.08 ; 41.516,95.739 41.63,95.739 ; 41.523,88.767 41.607,88.767 ; 41.523,95.747 41.63,95.747 ; 41.531,88.774 41.691,88.774 ; 41.531,89.049 41.744,89.049 ; 41.531,89.056 41.744,89.056 ; 41.531,89.064 41.744,89.064 ; 41.531,89.071 41.744,89.071 ; 41.531,89.079 41.744,89.079 ; 41.531,89.087 41.744,89.087 ; 41.531,89.094 41.744,89.094 ; 41.531,89.102 41.744,89.102 ; 41.531,89.11 41.744,89.11 ; 41.531,89.117 41.744,89.117 ; 41.531,89.308 41.744,89.308 ; 41.531,89.315 41.744,89.315 ; 41.531,89.323 41.744,89.323 ; 41.531,89.331 41.744,89.331 ; 41.531,89.338 41.744,89.338 ; 41.531,89.346 41.744,89.346 ; 41.531,89.353 41.744,89.353 ; 41.531,89.361 41.744,89.361 ; 41.531,89.369 41.744,89.369 ; 41.531,89.376 41.744,89.376 ; 41.531,89.574 41.744,89.574 ; 41.531,89.582 41.744,89.582 ; 41.531,89.59 41.744,89.59 ; 41.531,89.597 41.744,89.597 ; 41.531,89.605 41.744,89.605 ; 41.531,89.612 41.744,89.612 ; 41.531,89.62 41.744,89.62 ; 41.531,89.628 41.744,89.628 ; 41.531,89.635 41.744,89.635 ; 41.531,89.833 41.744,89.833 ; 41.531,89.841 41.744,89.841 ; 41.531,89.849 41.744,89.849 ; 41.531,89.856 41.744,89.856 ; 41.531,89.864 41.744,89.864 ; 41.531,89.872 41.744,89.872 ; 41.531,89.879 41.744,89.879 ; 41.531,89.887 41.744,89.887 ; 41.531,89.894 41.744,89.894 ; 41.531,89.902 41.744,89.902 ; 41.531,90.1 41.744,90.1 ; 41.531,90.108 41.744,90.108 ; 41.531,90.115 41.744,90.115 ; 41.531,90.123 41.744,90.123 ; 41.531,90.131 41.744,90.131 ; 41.531,90.138 41.744,90.138 ; 41.531,90.146 41.744,90.146 ; 41.531,90.153 41.744,90.153 ; 41.531,90.161 41.744,90.161 ; 41.531,95.754 41.638,95.754 ; 41.531,95.762 41.645,95.762 ; 41.539,89.033 41.737,89.033 ; 41.539,89.041 41.737,89.041 ; 41.539,89.125 41.737,89.125 ; 41.539,89.132 41.737,89.132 ; 41.539,89.292 41.737,89.292 ; 41.539,89.3 41.737,89.3 ; 41.539,89.384 41.737,89.384 ; 41.539,89.391 41.737,89.391 ; 41.539,89.552 41.737,89.552 ; 41.539,89.559 41.737,89.559 ; 41.539,89.567 41.744,89.567 ; 41.539,89.643 41.744,89.643 ; 41.539,89.651 41.737,89.651 ; 41.539,89.658 41.737,89.658 ; 41.539,89.818 41.737,89.818 ; 41.539,89.826 41.737,89.826 ; 41.539,89.91 41.737,89.91 ; 41.539,89.917 41.737,89.917 ; 41.539,90.077 41.737,90.077 ; 41.539,90.085 41.737,90.085 ; 41.539,90.093 41.744,90.093 ; 41.539,90.169 41.737,90.169 ; 41.539,90.176 41.737,90.176 ; 41.539,90.184 41.737,90.184 ; 41.539,95.769 41.653,95.769 ; 41.546,88.782 41.676,88.782 ; 41.546,89.018 41.729,89.018 ; 41.546,89.026 41.729,89.026 ; 41.546,89.14 41.729,89.14 ; 41.546,89.277 41.729,89.277 ; 41.546,89.285 41.729,89.285 ; 41.546,89.399 41.729,89.399 ; 41.546,89.407 41.729,89.407 ; 41.546,89.544 41.729,89.544 ; 41.546,89.666 41.729,89.666 ; 41.546,89.803 41.729,89.803 ; 41.546,89.811 41.729,89.811 ; 41.546,89.925 41.729,89.925 ; 41.546,89.933 41.729,89.933 ; 41.546,90.07 41.729,90.07 ; 41.546,90.192 41.729,90.192 ; 41.546,93.087 42.788,93.087 ; 41.546,95.777 41.66,95.777 ; 41.546,95.785 41.668,95.785 ; 41.554,89.01 41.721,89.01 ; 41.554,89.148 41.729,89.148 ; 41.554,89.155 41.721,89.155 ; 41.554,89.27 41.721,89.27 ; 41.554,89.414 41.721,89.414 ; 41.554,89.536 41.721,89.536 ; 41.554,89.673 41.721,89.673 ; 41.554,89.795 41.721,89.795 ; 41.554,89.94 41.721,89.94 ; 41.554,90.062 41.721,90.062 ; 41.554,90.199 41.721,90.199 ; 41.554,95.792 41.668,95.792 ; 41.561,89.003 41.714,89.003 ; 41.561,89.163 41.714,89.163 ; 41.561,89.262 41.714,89.262 ; 41.561,89.422 41.714,89.422 ; 41.561,89.529 41.714,89.529 ; 41.561,89.681 41.714,89.681 ; 41.561,89.788 41.714,89.788 ; 41.561,89.948 41.714,89.948 ; 41.561,90.054 41.721,90.054 ; 41.561,90.207 41.714,90.207 ; 41.561,95.8 41.676,95.8 ; 41.569,88.995 41.706,88.995 ; 41.569,89.43 41.706,89.43 ; 41.569,89.521 41.706,89.521 ; 41.569,89.689 41.706,89.689 ; 41.569,89.78 41.706,89.78 ; 41.569,89.955 41.706,89.955 ; 41.569,90.047 41.706,90.047 ; 41.569,90.214 41.706,90.214 ; 41.569,95.808 41.683,95.808 ; 41.569,95.815 41.691,95.815